# EAGLE board CT_schematic (EAGLE 7.6.0)

Size 100 x 80 mm. Coordinates in mm from the lower left corner, seen from the top.
Outline: 0,0 100,0 100,80 0,80 0,0
Copper layers (1*16): Top 0.035mm / dielectric 1.5mm / Bottom 0.035mm
Design rules "default": minimum track width 10mil, minimum drill 24mil, track to track 8mil, track to pad 8mil, pad to pad 8mil, via to via 8mil, smd to smd 8mil, copper to edge 40mil, drill to drill 8mil, minimum pad ring 10mil, minimum via ring 8mil, stop-mask expansion 4mil, vias tented up to drill 0mil, thermal gap 10mil

## Footprints (pad centres in the part's own frame; a part is rotated, then mirrored left to right if it is on the bottom)
C0603 = smd 0.8 x 0.8: 1 -0.762,0; 2 0.762,0
C0402 = smd 0.5 x 0.5: 1 -0.508,0; 2 0.508,0
C1206 = smd 1.3 x 1.6: 1 -1.524,0; 2 1.524,0
C1210 = smd 1.2 x 2.5: 1 -1.524,0; 2 1.524,0
EXV-9H = smd 3.505 x 1.676: 1 -2.857,0; 2 2.857,0
L0603 = smd 0.8 x 0.8: 1 -0.762,0; 2 0.762,0
PJ-037B_PACKAGE = drill 3.7 square: 1 12,0 | drill 3.2 square: 2 6,0
R0603 = smd 0.8 x 0.8: 1 -0.762,0; 2 0.762,0
LQFP32 = smd 0.54 x 0.85: 1 -2.8,-4.275; 2 -2,-4.275; 3 -1.2,-4.275; 4 -0.4,-4.275; 5 0.4,-4.275; 6 1.19,-4.275; 7 1.99,-4.275; 8 2.79,-4.275; 17 2.8,4.275; 18 2,4.275; 19 1.2,4.275; 20 0.4,4.275; 21 -0.4,4.275; 22 -1.2,4.275; 23 -2,4.275; 24 -2.8,4.275 | smd 0.85 x 0.54: 9 4.275,-2.8; 10 4.275,-2; 11 4.275,-1.2; 12 4.275,-0.4; 13 4.275,0.4; 14 4.275,1.2; 15 4.275,2; 16 4.275,2.8; 25 -4.275,2.8; 26 -4.275,2; 27 -4.275,1.2; 28 -4.275,0.4; 29 -4.275,-0.4; 30 -4.275,-1.2; 31 -4.275,-2; 32 -4.275,-2.8
SOIC-8 = smd 1.6 x 0.6: 1 -2.7,1.905 | smd 1.55 x 0.6: 2 -2.7,0.635; 3 -2.7,-0.635; 4 -2.7,-1.905; 5 2.7,-1.905; 6 2.7,-0.635; 7 2.7,0.635; 8 2.7,1.905
182-009-MALE = drill 1.194 pad 1.524 octagon: 1 -5.537,10.923; 2 -2.769,10.923; 3 0,10.923; 4 2.769,10.923; 5 5.537,10.923; 6 -4.153,8.08; 7 -1.384,8.08; 8 1.384,8.08; 9 4.153,8.08 | hole 3.048: -12.446,9.501; 12.446,9.501
ABLS-25.000MHZ-B2F-T = smd 5.6 x 2.8: 1 -3.81,0; 2 5.69,0
WSON-8 = smd 0.3 x 0.6: 1 -0.75,0; 2 0.05,0; 3 0.85,0; 4 1.65,0; 5 1.65,3.8; 6 0.85,3.8; 7 0.05,3.8; 8 -0.75,3.8 | smd 3 x 2.6: PAD 0.45,1.9
SON-6 = smd 0.55 x 0.3: 1 -0.355,0.5 | smd 0.52 x 0.3: 2 -0.37,0; 3 -0.37,-0.5; 4 0.37,-0.5; 5 0.37,0; 6 0.37,0.5
SW_4-1437565-2 = smd 1.4 x 2.1: 1 -2.23,4.55; 2 -2.23,-4.55; 3 2.23,4.55; 4 2.23,-4.55
LGM67K-G1J2-24-Z = smd 0.8 x 1.4: A -2,0; C 0,0
NC7SZ125M5X = smd 1.3 x 0.7: 1 -1.3,0.95; 2 -1.3,0; 3 -1.3,-0.95; 4 1.3,-0.95; 5 1.3,0.95
DUMMY_PACKAGE_87 = drill 0.3: 1 0,-1; 2 1.5,-1; 3 3,-1

## Placement (x,y rotation side)
C1  1e-07  [C0603]  -57.15,55.88 0 top  (outside the outline)
C2  1e-07  [C0603]  -60.96,55.88 0 top  (outside the outline)
C3  4.7e-06  [C0603]  -49.53,55.88 0 top  (outside the outline)
C4  1e-07  [C0603]  -64.77,55.88 0 top  (outside the outline)
C5  4.7e-06  [C0603]  -53.34,55.88 0 top  (outside the outline)
C6  1e-08  [C0603]  -15.24,60.96 0 top  (outside the outline)
C7  1e-08  [C0603]  -19.05,60.96 0 top  (outside the outline)
C8  1e-06  [C0603]  -22.86,60.96 0 top  (outside the outline)
C9  1e-11  [C0402]  -57.15,60.96 0 top  (outside the outline)
C10  1e-11  [C0402]  -60.96,60.96 0 top  (outside the outline)
C11  1e-07  [C0402]  -64.77,60.96 0 top  (outside the outline)
C12  1e-08  [C0402]  -15.24,66.04 0 top  (outside the outline)
C13  1e-05  [C1206]  -55.88,48.26 0 top  (outside the outline)
C14  1e-05  [C1210]  -49.53,49.53 0 top  (outside the outline)
C15  1e-07  [C0402]  -19.05,66.04 0 top  (outside the outline)
C16  0.0001  [EXV-9H]  -38.1,40.64 0 top  (outside the outline)
C17  0.0001  [EXV-9H]  -49.53,40.64 0 top  (outside the outline)
C18  1e-08  [C0402]  -22.86,66.04 0 top  (outside the outline)
F1  240.0  [L0603]  -26.67,60.96 0 top  (outside the outline)
J1  PJ-037B  [PJ-037B_PACKAGE]  -27.94,29.21 0 top  (outside the outline)
R1  10000.0  [R0603]  -35.56,55.88 0 top  (outside the outline)
R2  1000.0  [R0603]  -30.48,60.96 0 top  (outside the outline)
R3  1600.5  [R0603]  -34.29,60.96 0 top  (outside the outline)
R4  4700.0  [R0603]  -38.1,60.96 0 top  (outside the outline)
R5  120.0  [R0603]  -41.91,60.96 0 top  (outside the outline)
R6  470000.0  [R0603]  -15.24,55.88 0 top  (outside the outline)
R7  100000.0  [R0603]  -20.32,55.88 0 top  (outside the outline)
R8  2231.0  [R0603]  -45.72,60.96 0 top  (outside the outline)
R9  1000.0  [R0603]  -49.53,60.96 0 top  (outside the outline)
R10  10000.0  [R0603]  -40.64,55.88 0 top  (outside the outline)
R11  10000.0  [R0603]  -45.72,55.88 0 top  (outside the outline)
R12  9100.0  [R0603]  -53.34,60.96 0 top  (outside the outline)
R13  680000.0  [R0603]  -25.4,55.88 0 top  (outside the outline)
R14  120000.0  [R0603]  -30.48,55.88 0 top  (outside the outline)
U1  stm32f042k6t7  [LQFP32]  -62.23,7.62 0 top  (outside the outline)
U2  SN65HVD230D  [SOIC-8]  -58.42,27.94 0 top  (outside the outline)
U3  182-009-113R531  [182-009-MALE]  -36.83,6.35 0 top  (outside the outline)
U4  ABLS-25.000MHZ-B2F-T  [ABLS-25.000MHZ-B2F-T]  -26.67,49.53 0 top  (outside the outline)
U5  LP3878SDX-ADJ/NOPB  [WSON-8]  -30.48,39.37 0 top  (outside the outline)
U6  TPS3895ADRYR  [SON-6]  -31.75,64.77 0 top  (outside the outline)
U7  4-1437565-2  [SW_4-1437565-2]  -44.45,27.94 0 top  (outside the outline)
U8  Q65110A2395  [LGM67K-G1J2-24-Z]  -38.1,49.53 0 top  (outside the outline)
U9  nc7sz125m5x  [NC7SZ125M5X]  -60.96,48.26 0 top  (outside the outline)
U10  Dummy  [DUMMY_PACKAGE_87]  -29.21,66.04 0 top  (outside the outline)

## Library data of the parts
C1-C18 F1 J1 R1-R14 U1-U10 = circuit_tree

## Nets
CLK_CRYSTAL_U1_2: C9.1 U1.2 U4.1
CLK_CRYSTAL_U1_3: C10.1 U1.3 U4.2
GND: C1.2 C2.2 C3.2 C4.2 C5.2 C6.2 C7.2 C8.2 C9.2 C10.2 C11.2 C12.2 C13.2 C14.2 C15.2 C16.2 C17.2 C18.2 J1.2 R2.2 R6.2 R9.2 R12.2 R14.2 U1.16 U1.32 U2.2 U3.5 U5.3 U5.PAD U6.2 U8.C U9.1 U9.3 U10.1
NET_U1_4: R4.1 U1.4 U9.4
NET_U1_5: C6.1 C7.1 C8.1 F1.1 U1.5
NET_U1_30: R3.1 U1.30 U8.A
NET_U1_31: R1.1 U1.31 U7.3 U7.4
NET_U2_6: R5.2 U2.6
NET_U2_8: R6.1 U2.8
NET_U3_2: R5.2 U2.6 U3.2
NET_U3_3: R5.1 U2.7 U3.3
NET_U5_1: C12.1 U5.1
NET_U5_6: R8.2 R9.1 U5.6
NET_U5_8: R7.1 U5.8
NET_U6_1: R11.1 R12.1 U6.1
NET_U6_3: R13.2 R14.1 U6.3
NET_U6_4: R10.1 U6.4 U9.2
NET_U7_1: R2.1 U7.1 U7.2
PROC_CAN_RX: U1.21 U2.4
PROC_CAN_TX: U1.22 U2.1
PROC_PA0: U1.6 U10.2
PROC_PA1: U1.7 U10.3
VCC_S1_9V7: C13.1 C16.1 C17.1 J1.1 R7.2 U5.4
VCC_TIER1_3V3: C1.1 C2.1 C3.1 C4.1 C5.1 C11.1 C14.1 C15.1 C18.1 F1.2 R1.2 R3.2 R4.2 R8.1 R10.2 R11.2 R13.1 U1.1 U1.17 U2.3 U5.5 U6.6 U9.5

## Tracks (layer width: path | path; a pad name or v marks a point on that pad's centre or on a via)
CLK_CRYSTAL_U1_2  (2 unrouted)
CLK_CRYSTAL_U1_3  (2 unrouted)
GND  (34 unrouted)
NET_U1_4  (2 unrouted)
NET_U1_5  (4 unrouted)
NET_U1_30  (2 unrouted)
NET_U1_31  (3 unrouted)
NET_U2_6  (1 unrouted)
NET_U2_8  (1 unrouted)
NET_U3_2  (2 unrouted)
NET_U3_3  (2 unrouted)
NET_U5_1  (1 unrouted)
NET_U5_6  (2 unrouted)
NET_U5_8  (1 unrouted)
NET_U6_1  (2 unrouted)
NET_U6_3  (2 unrouted)
NET_U6_4  (2 unrouted)
NET_U7_1  (2 unrouted)
PROC_CAN_RX  (1 unrouted)
PROC_CAN_TX  (1 unrouted)
PROC_PA0  (1 unrouted)
PROC_PA1  (1 unrouted)
VCC_S1_9V7  (5 unrouted)
VCC_TIER1_3V3  (22 unrouted)